# Altium PCB ngu-nghiep.pcbdoc
Units mm, origin at the board's own origin, x right, y up, seen from the top; angles counter-clockwise.
Board outline 76.4 x 59.23 mm, 2 copper layers (Top Layer, Bottom Layer); 80 components, 18 nets, 344 pads, 64 vias.
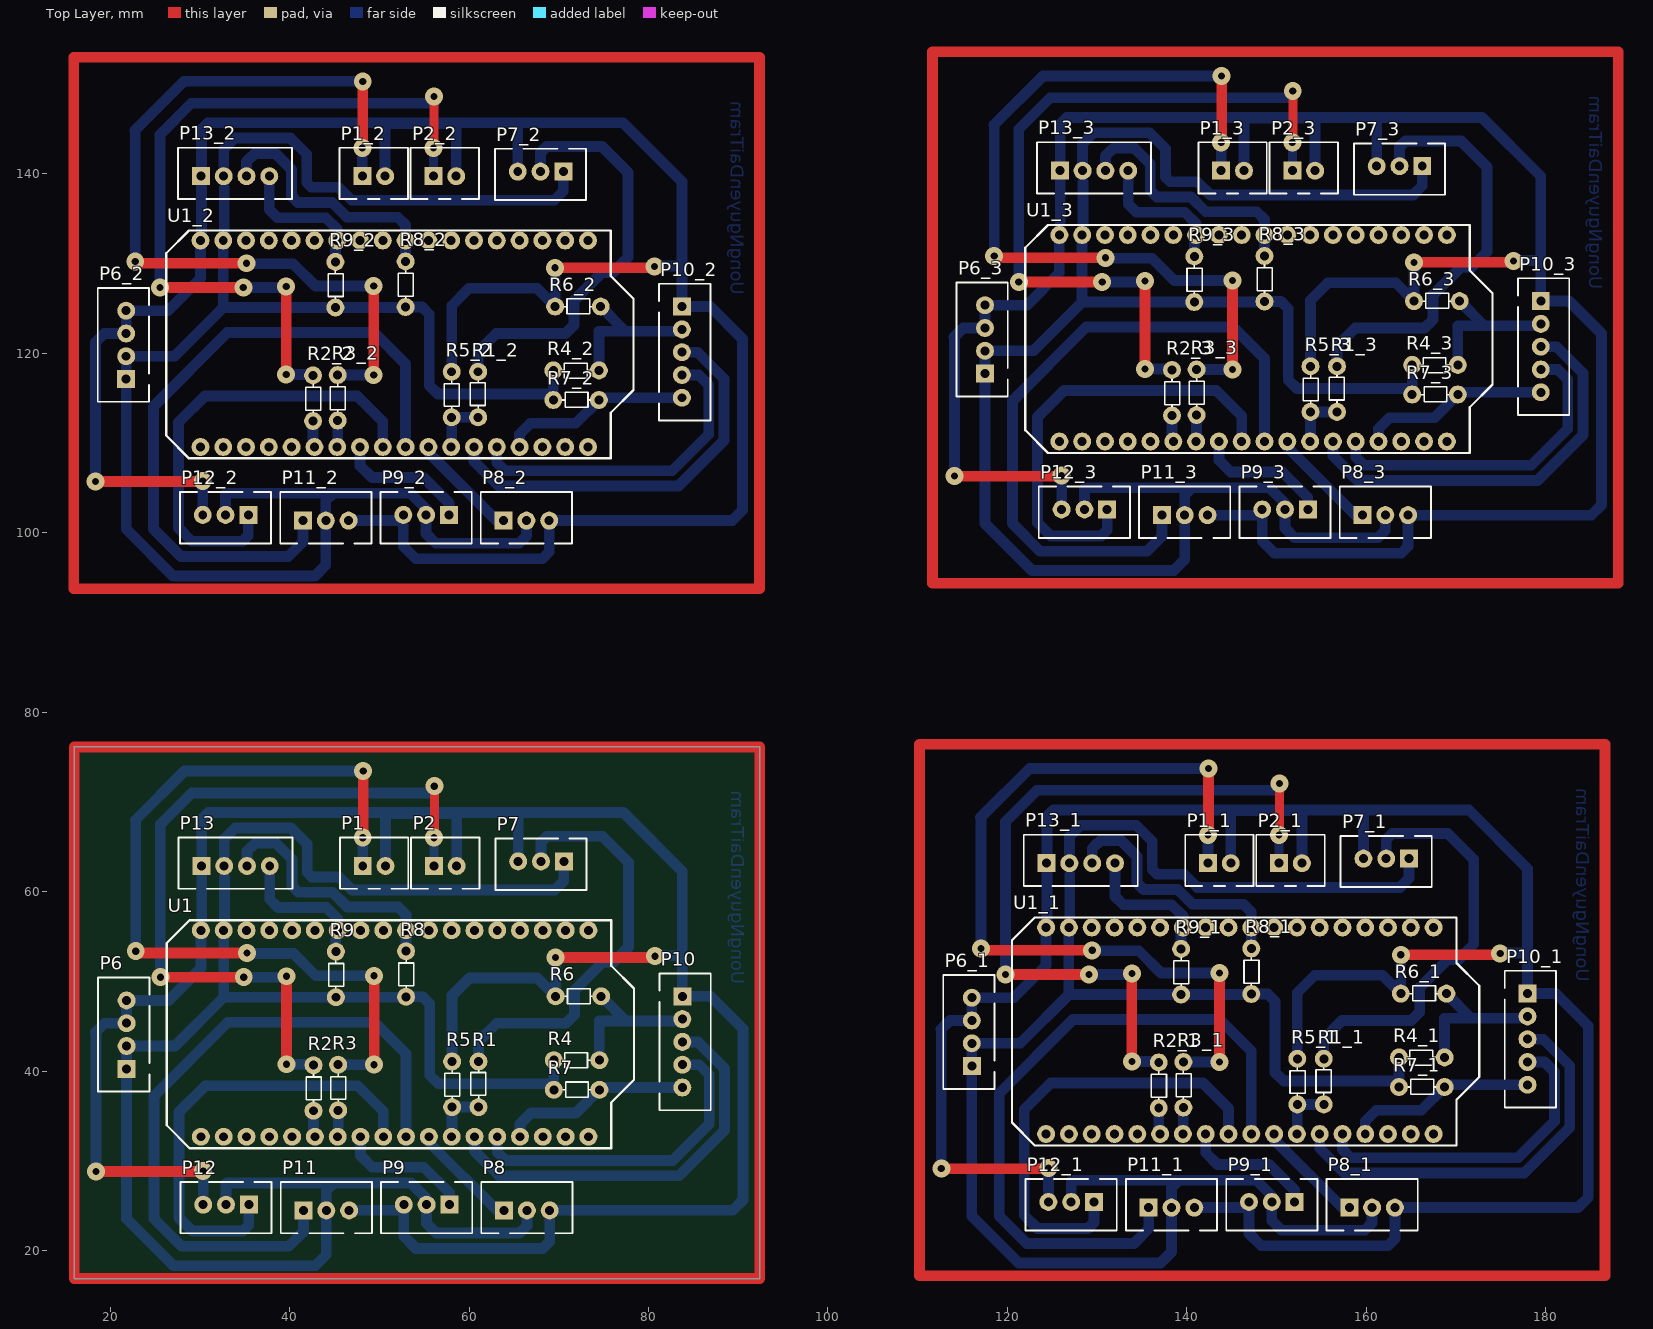
[diagram p0: Top Layer view]
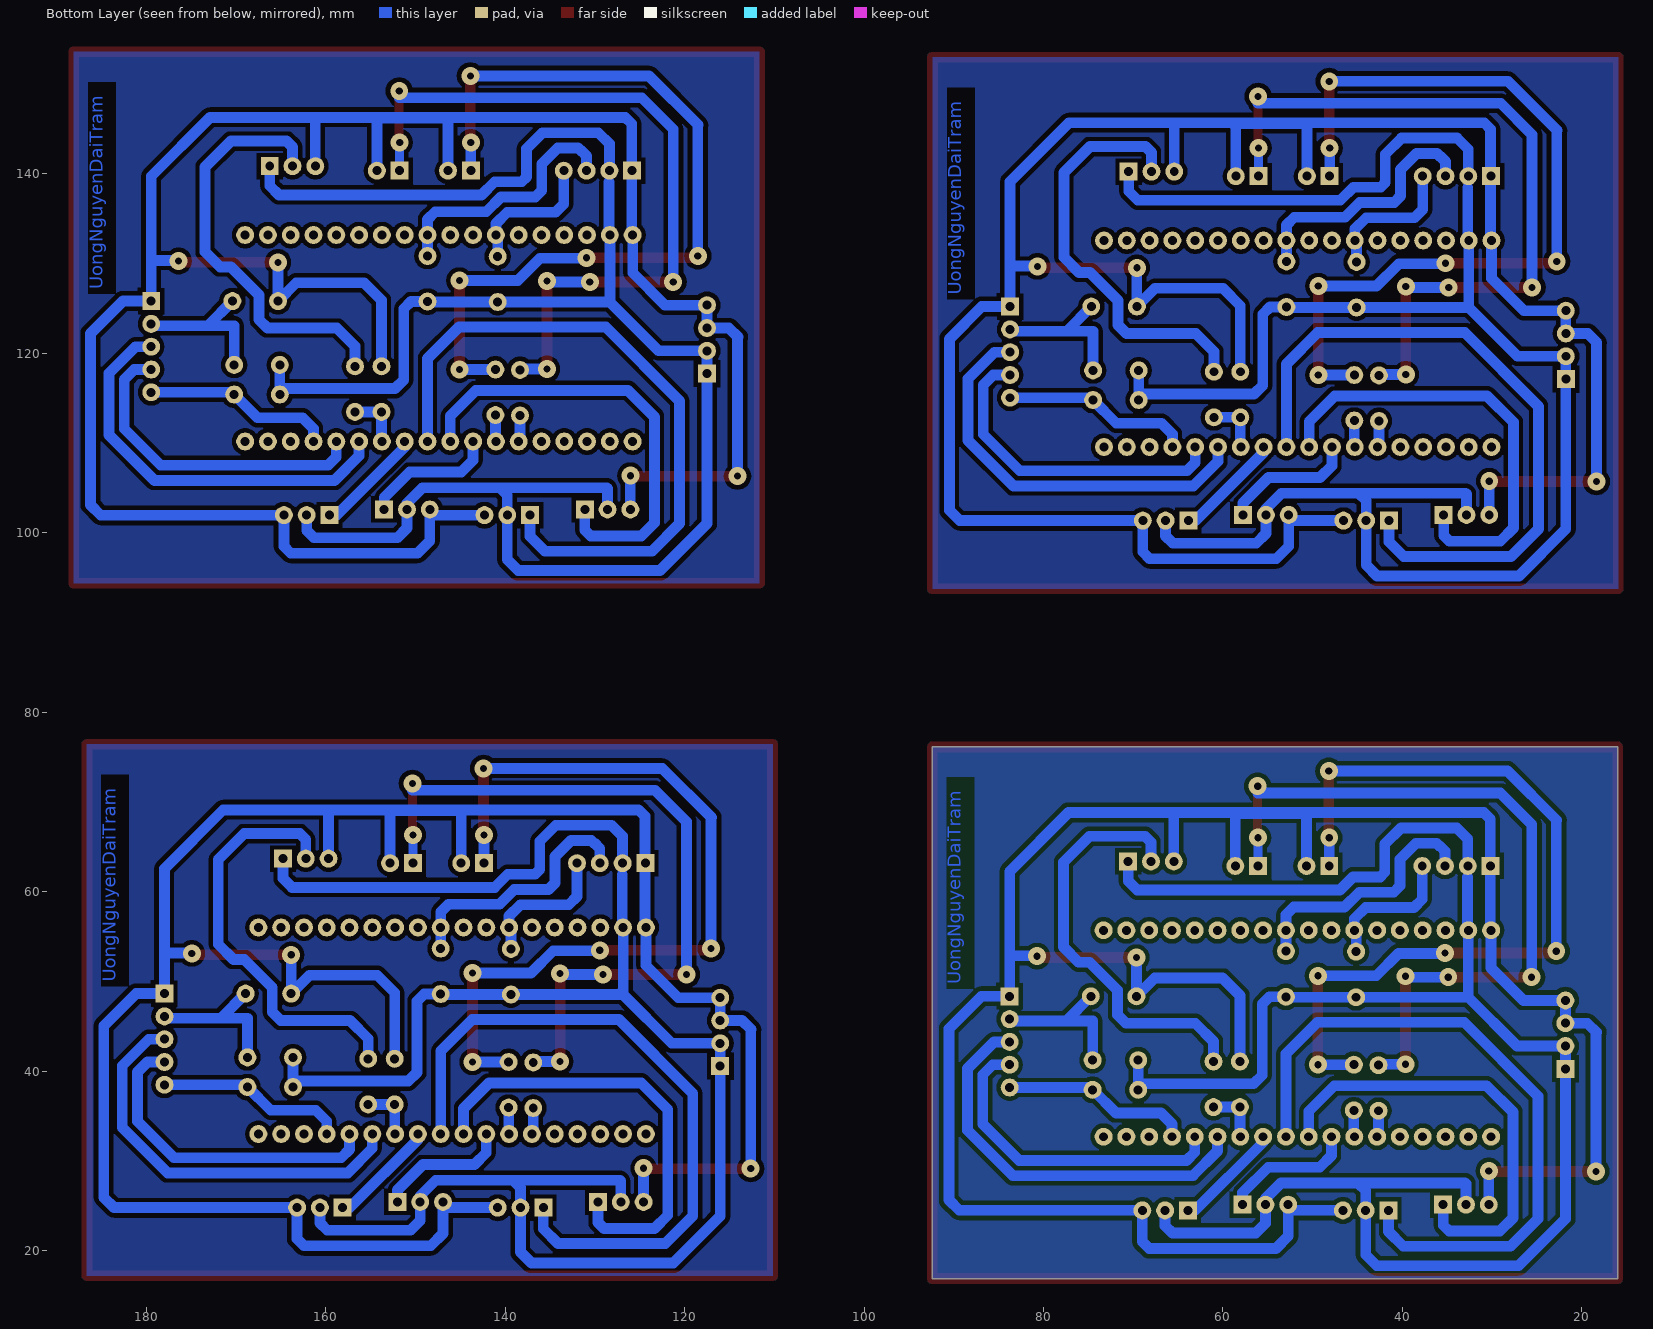
[diagram p1: Bottom Layer view, seen from below]

## Layer stack, top to bottom
Top Solder: solder mask 0.0102, Solder Resist, Dk 3.5
Top Layer: signal copper 0.0356
Dielectric 1: dielectric 0.32, FR-4, Dk 4.8
Bottom Layer: signal copper 0.0356
Bottom Solder: solder mask 0.0102, Solder Resist, Dk 3.5

## Board outline
16.002,16.916 16.002,76.149 92.405,76.149 92.405,16.916

## Design rules (kind name [scope] priority, off if disabled: settings)
Clearance [All] p1: gap=0.5 ignorepadtopadclearanceinfootprint=FALSE
PolygonConnect [All] p1: connectstyle=Relief reliefconductorwidth=0.254 reliefentries=4 polygonreliefangle="90 Angle" airgapwidth=0.254
RoutingVias [All] p1: holewidth=0.711 width=1.27 viastyle="Through Hole" minholewidth=0.711 minwidth=1.27 maxholewidth=0.711 maxwidth=1.27
SolderMaskExpansion [All] p1: expansion=0.102
Width [All] p1: maxlimit=1.2 minlimit=1 preferedwidth=1
30 further rules are at their usual default settings.

## Classes and differential pairs
component class Ngu-nghiep: P1 P2 P4 P6 P7 P8 P9 P10 P11 P12 P13 R1 R2 R3 R4 R5 R6 R7 R8 R9 U1

## Components (designator, comment, footprint, x,y, rotation, side; value= is the part's Value field where it differs from the comment)
P1 "Connector" JST-XH_B2B-XH-A 49.428,62.89 r0 top
P1_1 "Connector" JST-XH_B2B-XH-A 143.612,63.195 r0 top (schematic designator P1)
P1_2 "Connector" JST-XH_B2B-XH-A 49.378,139.751 r0 top (schematic designator P1)
P1_3 "Connector" JST-XH_B2B-XH-A 145.085,140.36 r0 top (schematic designator P1)
P2 "Connector" JST-XH_B2B-XH-A 57.353,62.89 r0 top
P2_1 "Connector" JST-XH_B2B-XH-A 151.536,63.195 r0 top (schematic designator P2)
P2_2 "Connector" JST-XH_B2B-XH-A 57.302,139.751 r0 top (schematic designator P2)
P2_3 "Connector" JST-XH_B2B-XH-A 153.01,140.36 r0 top (schematic designator P2)
P6 "Nguon" JST-XH_B4B-XH-A 21.844,44.094 r90 top
P6_1 "Nguon" JST-XH_B4B-XH-A 116.027,44.399 r90 top (schematic designator P6)
P6_2 "Nguon" JST-XH_B4B-XH-A 21.793,120.955 r90 top (schematic designator P6)
P6_3 "Nguon" JST-XH_B4B-XH-A 117.5,121.564 r90 top (schematic designator P6)
P7 "Connector" JST-XH_B3B-XH-A 68.021,63.398 r180 top
P7_1 "Connector" JST-XH_B3B-XH-A 162.204,63.703 r180 top (schematic designator P7)
P7_2 "Connector" JST-XH_B3B-XH-A 67.97,140.259 r180 top (schematic designator P7)
P7_3 "Connector" JST-XH_B3B-XH-A 163.678,140.868 r180 top (schematic designator P7)
P8 "Connector" JST-XH_B3B-XH-A 66.446,24.511 r0 top
P8_1 "Connector" JST-XH_B3B-XH-A 160.63,24.816 r0 top (schematic designator P8)
P8_2 "Connector" JST-XH_B3B-XH-A 66.396,101.371 r0 top (schematic designator P8)
P8_3 "Connector" JST-XH_B3B-XH-A 162.103,101.981 r0 top (schematic designator P8)
P9 "Connector" JST-XH_B3B-XH-A 55.27,25.146 r180 top
P9_1 "Connector" JST-XH_B3B-XH-A 149.454,25.451 r180 top (schematic designator P9)
P9_2 "Connector" JST-XH_B3B-XH-A 55.22,102.006 r180 top (schematic designator P9)
P9_3 "Connector" JST-XH_B3B-XH-A 150.927,102.616 r180 top (schematic designator P9)
P10 "Joystick" JST-XH_B5B-XH-A 83.769,43.282 r270 top
P10_1 "Joystick" JST-XH_B5B-XH-A 177.952,43.586 r270 top (schematic designator P10)
P10_2 "Joystick" JST-XH_B5B-XH-A 83.718,120.142 r270 top (schematic designator P10)
P10_3 "Joystick" JST-XH_B5B-XH-A 179.426,120.752 r270 top (schematic designator P10)
P11 "Connector" JST-XH_B3B-XH-A 44.094,24.511 r0 top
P11_1 "Connector" JST-XH_B3B-XH-A 138.278,24.816 r0 top (schematic designator P11)
P11_2 "Connector" JST-XH_B3B-XH-A 44.044,101.371 r0 top (schematic designator P11)
P11_3 "Connector" JST-XH_B3B-XH-A 139.751,101.981 r0 top (schematic designator P11)
P12 "Connector" JST-XH_B3B-XH-A 32.918,25.146 r180 top
P12_1 "Connector" JST-XH_B3B-XH-A 127.102,25.451 r180 top (schematic designator P12)
P12_2 "Connector" JST-XH_B3B-XH-A 32.868,102.006 r180 top (schematic designator P12)
P12_3 "Connector" JST-XH_B3B-XH-A 128.575,102.616 r180 top (schematic designator P12)
P13 "RTC" JST-XH_B4B-XH-A 33.985,62.89 r0 top
P13_1 "RTC" JST-XH_B4B-XH-A 128.168,63.195 r0 top (schematic designator P13)
P13_2 "RTC" JST-XH_B4B-XH-A 33.934,139.751 r0 top (schematic designator P13)
P13_3 "RTC" JST-XH_B4B-XH-A 129.642,140.36 r0 top (schematic designator P13)
R1 "5k6" R1/8W 61.062,38.557 r90 top value="R1/4W - 1K"
R1_1 "5k6" R1/8W 155.245,38.862 r90 top value="R1/4W - 1K" (schematic designator R1)
R1_2 "5k6" R1/8W 61.011,115.418 r90 top value="R1/4W - 1K" (schematic designator R1)
R1_3 "5k6" R1/8W 156.718,116.027 r90 top value="R1/4W - 1K" (schematic designator R1)
R2 "1k" R1/8W 42.672,38.151 r270 top value="R1/4W - 1K"
R2_1 "1k" R1/8W 136.855,38.456 r270 top value="R1/4W - 1K" (schematic designator R2)
R2_2 "1k" R1/8W 42.621,115.011 r270 top value="R1/4W - 1K" (schematic designator R2)
R2_3 "1k" R1/8W 138.328,115.621 r270 top value="R1/4W - 1K" (schematic designator R2)
R3 "1k" R1/8W 45.415,38.202 r270 top value="R1/4W - 1K"
R3_1 "1k" R1/8W 139.598,38.506 r270 top value="R1/4W - 1K" (schematic designator R3)
R3_2 "1k" R1/8W 45.364,115.062 r270 top value="R1/4W - 1K" (schematic designator R3)
R3_3 "1k" R1/8W 141.072,115.672 r270 top value="R1/4W - 1K" (schematic designator R3)
R4 "3k" R1/8W 71.984,41.25 r180 top value="R1/4W - 1K"
R4_1 "3k" R1/8W 166.167,41.554 r180 top value="R1/4W - 1K" (schematic designator R4)
R4_2 "3k" R1/8W 71.933,118.11 r180 top value="R1/4W - 1K" (schematic designator R4)
R4_3 "3k" R1/8W 167.64,118.72 r180 top value="R1/4W - 1K" (schematic designator R4)
R5 "10k" R1/8W 58.115,38.557 r270 top value="R1/4W - 1K"
R5_1 "10k" R1/8W 152.298,38.862 r270 top value="R1/4W - 1K" (schematic designator R5)
R5_2 "10k" R1/8W 58.064,115.418 r270 top value="R1/4W - 1K" (schematic designator R5)
R5_3 "10k" R1/8W 153.772,116.027 r270 top value="R1/4W - 1K" (schematic designator R5)
R6 "4k7" R1/8W 72.187,48.362 r0 top value="R1/4W - 1K"
R6_1 "4k7" R1/8W 166.37,48.666 r0 top value="R1/4W - 1K" (schematic designator R6)
R6_2 "4k7" R1/8W 72.136,125.222 r0 top value="R1/4W - 1K" (schematic designator R6)
R6_3 "4k7" R1/8W 167.843,125.832 r0 top value="R1/4W - 1K" (schematic designator R6)
R7 "10K" R1/8W 71.984,37.948 r0 top value="R1/4W - 1K"
R7_1 "10K" R1/8W 166.167,38.252 r0 top value="R1/4W - 1K" (schematic designator R7)
R7_2 "10K" R1/8W 71.933,114.808 r0 top value="R1/4W - 1K" (schematic designator R7)
R7_3 "10K" R1/8W 167.64,115.418 r0 top value="R1/4W - 1K" (schematic designator R7)
R8 "4k7" R1/8W 52.984,50.851 r270 top value="R1/4W - 1K"
R8_1 "4k7" R1/8W 147.168,51.156 r270 top value="R1/4W - 1K" (schematic designator R8)
R8_2 "4k7" R1/8W 52.934,127.711 r270 top value="R1/4W - 1K" (schematic designator R8)
R8_3 "4k7" R1/8W 148.641,128.321 r270 top value="R1/4W - 1K" (schematic designator R8)
R9 "4k7" R1/8W 45.161,50.8 r270 top value="R1/4W - 1K"
R9_1 "4k7" R1/8W 139.344,51.105 r270 top value="R1/4W - 1K" (schematic designator R9)
R9_2 "4k7" R1/8W 45.11,127.66 r270 top value="R1/4W - 1K" (schematic designator R9)
R9_3 "4k7" R1/8W 140.818,128.27 r270 top value="R1/4W - 1K" (schematic designator R9)
U1 "ESP32_heltec" ESP32_WFK_Heltec 51.714,44.145 r0 top
U1_1 "ESP32_heltec" ESP32_WFK_Heltec 145.898,44.45 r0 top (schematic designator U1)
U1_2 "ESP32_heltec" ESP32_WFK_Heltec 51.664,121.006 r0 top (schematic designator U1)
U1_3 "ESP32_heltec" ESP32_WFK_Heltec 147.371,121.615 r0 top (schematic designator U1)

## Footprints (in the part's own frame and the unit in brackets; to place one, negate y for a bottom-side part, rotate by r counter-clockwise, add the part's x,y. Pads: shape width x height; smd on the part's side, far side on the other; paste and mask are expansions set on the pad)
ESP32_WFK_Heltec [mm]
  round 2 hole 1: 1(-21.59,11.577) 2(-19.05,11.577) 3(-16.51,11.577) 4(-13.97,11.577) 5(-11.43,11.577) 6(-8.89,11.577) 7(-6.35,11.577) 8(-3.81,11.577) 9(-1.27,11.577) 10(1.27,11.577) 11(3.81,11.577) 12(6.35,11.577) 13(8.89,11.577) 14(11.43,11.577) 15(13.97,11.577) 16(16.51,11.577) 17(19.05,11.577) 18(21.59,11.577) 19(21.59,-11.43) 20(19.05,-11.43) 21(16.51,-11.43) 22(13.97,-11.43) 23(11.43,-11.43) 24(8.89,-11.43) 25(6.35,-11.43) 26(3.81,-11.43) 27(1.27,-11.43) 28(-1.27,-11.43) 29(-3.81,-11.43) 30(-6.35,-11.43) 31(-8.89,-11.43) 32(-11.43,-11.43) 33(-13.97,-11.43) 34(-16.51,-11.43) 35(-19.05,-11.43) 36(-21.59,-11.43)
  silkscreen extent -25.4,-12.7 26.67,12.7, body extent -24.6,-12.68 27.15,12.62, height 9.81
JST-XH_B2B-XH-A [mm] "JST; XH series; 2 circuit; 2.54 Pitch; Through-hole type; Top entry"
  rect 2x2 hole 1: 1(-1.27,0)
  round 2 hole 1: 2(1.27,0)
  silkscreen extent -3.81,-2.54 3.81,3.17, body extent -3.7,-2.56 3.7,3.19, height 7
JST-XH_B3B-XH-A [mm] "JST; XH series; 3 circuit; 2.54 Pitch; Through-hole type; Top entry"
  rect 2x2 hole 1: 1(-2.54,0)
  round 2 hole 1: 2(0,0) 3(2.54,0)
  silkscreen extent -5.08,-2.54 5.08,3.18, body extent -4.95,-2.55 4.95,3.2, height 7
JST-XH_B4B-XH-A [mm] "JST; XH series; 4 circuit; 2.54 Pitch; Through-hole type; Top entry"
  rect 2x2 hole 1: 1(-3.81,0)
  round 2 hole 1: 2(-1.27,0) 3(1.27,0) 4(3.81,0)
  silkscreen extent -6.35,-2.54 6.35,3.18, body extent -6.2,-2.57 6.2,3.18, height 7
JST-XH_B5B-XH-A [mm] "JST; XH series; 5 circuit; 2.54 Pitch; Through-hole type; Top entry"
  rect 2x2 hole 1: 1(-5.08,0)
  round 2 hole 1: 2(-2.54,0) 3(0,0) 4(2.54,0) 5(5.08,0)
  silkscreen extent -7.62,-2.54 7.62,3.18, body extent -7.45,-2.55 7.45,3.2, height 7
R1/8W [mm] "R 1/8W, 2 pin, 300mil"
  round 2 hole 1: 1(-2.54,0) 2(2.54,0)
  silkscreen extent -1.52,-0.81 1.55,0.86, body extent -3.43,-0.9 3.43,0.94, height 2.19

## Part data
P1 P1_1 P1_2 P1_3 P2 P2_1 P2_2 P2_3: library part Connector_2pin
P6 P6_1 P6_2 P6_3 P13 P13_1 P13_2 P13_3: library part Connector_4pin
P7 P7_1 P7_2 P7_3 P8 P8_1 P8_2 P8_3 P9 P9_1 P9_2 P9_3 P11 P11_1 P11_2 P11_3 P12 P12_1 P12_2 P12_3: library part Connector_3pin
P10 P10_1 P10_2 P10_3: library part Connector_5pin
R1 R1_1 R1_2 R1_3 R2 R2_1 R2_2 R2_3 R3 R3_1 R3_2 R3_3 R4 R4_1 R4_2 R4_3 R5 R5_1 R5_2 R5_3 R6 R6_1 R6_2 R6_3 R7 R7_1 R7_2 R7_3 R8 R8_1 R8_2 R8_3 R9 R9_1 R9_2 R9_3: library part R, "Resistor 1/4W"
U1 U1_1 U1_2 U1_3: "ESP32 IOT kit"

## Via types
v1: diameter 2, hole 0.8, Top Layer to Bottom Layer, 64 vias

## Nets (pads, with @x,y where several pads share a name; then routed paths per layer and width w, separated by ;. In a path a pad name is that pad's centre, name@x,y a point inside that pad or via, vN(x,y) a via of type N, cw(c..) or ccw(c..) an arc to the next point about the centre after c; other vN are vias at no path point)
3V3_Joystick: P10.2 R4.1 R6.2 | length 16.7
  Bottom Layer w1.2: R4.1@74.524,42.113 74.524,45.618 77.47,45.618 ; R6.2 77.47,45.618 ; P10.2 83.566,45.618 77.47,45.618
+5: P6.1 P6.2 P7.1 P8.2 P9.2 P11.2 P12.2 P13.2 R4.2 R7.1 R8.2 R9.2 U1.2 | length 218.8
  Bottom Layer w1.2: P13.2 32.715,65.888 33.958,67.13 40.159,67.13 41.961,65.329 41.961,62.179 42.472,61.668 45.503,61.668 46.972,60.198 69.545,60.198 70.561,61.214 P7.1 ; 32.766,61.62 32.766,55.824 U1.2 32.657,55.714 32.657,48.674 32.664,48.666 ; P12.2 32.918,27.469 33.02,27.571 44.945,27.571 ; P8.2 66.446,22.809 65.634,21.996 56.337,21.996 55.27,23.063 P9.2 55.27,25.828 53.528,27.571 44.945,27.571 ; R4.2 R7.1 68.783,38.608 56.591,38.608 55.626,39.573 55.626,47.498 54.813,48.311 R8.2 52.934,48.26 R9.2 33.071,48.26 32.664,48.666 ; 32.664,48.666 32.664,48.26 27.229,42.824 P6.2 P6.1 21.844,23.571 27.076,18.339 42.875,18.339 44.094,19.558 P11.2 44.094,26.721 44.945,27.571
Alarm: R2.2 U1.31 | length 3
  Bottom Layer w1.2: R2.2 42.672,32.868 U1.31
Error: R3.2 U1.30 | length 3
  Bottom Layer w1.2: U1.30 45.415,32.766 R3.2
GND: P1.2 P2.2 P6.3 P6.4 P7.3 P8.3 P9.3 P10.1 P11.3 P12.3 P13.1 R5.1 R6.1 U1.1 | length 278.1
  Top Layer w1.2: v1(18.44,28.854) 30.328,28.854 v1(30.378,28.905) ; v1(69.647,52.68) 80.569,52.68 v1(80.721,52.832)
  Bottom Layer w1.2: v1(18.44,28.854) 18.44,44.298 18.39,44.348 19.406,45.364 P6.3 P6.4 26.518,47.904 30.124,51.511 U1.1 30.226,55.824 30.226,68.123 30.937,68.834 77.216,68.834 83.769,62.281 83.769,52.883 ; P12.3 v1(30.378,28.905) ; P11.3 52.095,24.511 P9.3 52.73,21.641 54.102,20.269 68.224,20.269 68.986,21.031 P8.3 89.383,24.511 90.526,25.654 90.526,44.755 86.919,48.362 P10.1 83.769,52.883 ; P1.2 50.698,68.377 51.054,68.732 58.928,68.732 58.674,68.478 ; R5.1 58.115,48.463 60.046,50.394 67.615,50.394 R6.1 v1(69.647,52.68) ; P2.2 58.623,68.428 ; P7.3 65.481,68.326 ; v1(80.721,52.832) 80.772,52.883 83.769,52.883
NetP1_1: P1.1 R3.1 | length 94.6
  Top Layer w1.2: v1(22.86,53.391) 23.063,53.188 v1(35.255,53.188) ; v1(48.158,66.04) 48.209,66.091 v1(48.209,73.457) ; v1(49.428,40.742) v1(49.428,50.648)
  Bottom Layer w1.2: v1(22.86,53.391) 22.86,67.92 22.809,67.97 28.296,73.457 v1(48.209,73.457) ; v1@35.255,53.34 35.458,53.137 40.44,53.137 42.93,50.648 v1(49.428,50.648) ; R3.1 v1(49.428,40.742) ; P1.1 v1(48.158,66.04) v1@48.158,66.091
NetP2_1: P2.1 R2.1 | length 85.6
  Top Layer w1: v1(56.083,66.04) 56.134,66.091 v1(56.134,71.78)
  Top Layer w1.2: v1(25.603,50.495) v1(34.9,50.495) ; v1(39.675,40.792) v1(39.675,50.597)
  Bottom Layer w1: P2.1 v1(56.083,66.04)
  Bottom Layer w1.2: v1(25.603,50.495) 25.603,67.513 29.108,71.018 56.134,71.018 v1(56.134,71.78) ; v1(34.9,50.495) 39.573,50.495 v1(39.675,50.597) ; v1(39.675,40.792) 42.57,40.792 R2.1
pH_pin: P8.1 U1.26 | length 12.1
  Bottom Layer w1.2: U1.26 55.524,32.106 63.119,24.511 P8.1
SCL: P13.4 R9.1 U1.7 | length 15.9
  Bottom Layer w1.2: P13.4 37.795,59.182 38.71,58.268 44.094,58.268 45.364,56.998 U1.7 45.161,55.519 R9.1
SDA: P13.3 R8.1 U1.10 | length 28.9
  Bottom Layer w1.2: P13.3 35.255,64.534 35.8,65.078 35.858,65.078 36.21,65.43 38.478,65.43 40.261,63.647 40.261,60.679 40.972,59.968 44.799,59.968 46.448,58.318 52.121,58.318 52.984,57.455 U1.10 R8.1
SERVO_1: P12.1 U1.28 | length 50.7
  Bottom Layer w1.2: P12.1 35.458,22.86 34.798,22.2 29.159,22.2 27.686,23.673 27.686,35.458 30.632,38.405 47.6,38.405 50.444,35.56 U1.28
SERVO_2: P11.1 U1.27 | length 76.8
  Bottom Layer w1.2: P11.1 41.554,22.149 39.905,20.5 27.964,20.5 24.892,23.571 24.892,37.236 33.122,45.466 49.479,45.466 52.984,41.961 U1.27
SS2: R1.1 R5.2 U1.25 | length 6.3
  Bottom Layer w1.2: U1.25 58.115,32.766 R5.2 R1.1
SW: P10.5 R7.2 U1.22 | length 21.2
  Bottom Layer w1.2: U1.22 65.684,34.138 66.904,35.357 71.933,35.357 R7.2 74.778,38.202 P10.5
Tem_pin: P9.1 U1.29 | length 15
  Bottom Layer w1.2: U1.29 47.904,30.632 49.225,29.312 54.966,29.312 57.81,26.467 P9.1
Tur_pin: P7.2 R1.2 | length 47.7
  Bottom Layer w1.2: R1.2 61.062,43.332 63.094,45.364 70.815,45.364 71.747,46.296 71.747,49.039 74.868,52.16 76.087,52.16 77.775,53.848 77.775,63.297 74.879,66.192 68.682,66.192 68.021,65.532 P7.2
VRx: P10.3 U1.24 | length 45.5
  Bottom Layer w1.2: U1.24 60.604,31.124 63.355,28.374 83.407,28.374 88.466,33.433 88.466,40.328 85.513,43.282 P10.3
VRy: P10.4 U1.23 | length 36.4
  Bottom Layer w1.2: U1.23 63.144,30.988 64.059,30.074 82.702,30.074 86.766,34.138 86.766,39.624 85.649,40.742 P10.4
pads on no net: P1_1.1 P1_1.2 P1_2.1 P1_2.2 P1_3.1 P1_3.2 P2_1.1 P2_1.2 P2_2.1 P2_2.2 P2_3.1 P2_3.2 P6_1.1 P6_1.2 P6_1.3 P6_1.4 P6_2.1 P6_2.2 P6_2.3 P6_2.4 P6_3.1 P6_3.2 P6_3.3 P6_3.4 P7_1.1 P7_1.2 P7_1.3 P7_2.1 P7_2.2 P7_2.3 P7_3.1 P7_3.2 P7_3.3 P8_1.1 P8_1.2 P8_1.3 P8_2.1 P8_2.2 P8_2.3 P8_3.1 P8_3.2 P8_3.3 P9_1.1 P9_1.2 P9_1.3 P9_2.1 P9_2.2 P9_2.3 P9_3.1 P9_3.2 P9_3.3 P10_1.1 P10_1.2 P10_1.3 P10_1.4 P10_1.5 P10_2.1 P10_2.2 P10_2.3 P10_2.4 P10_2.5 P10_3.1 P10_3.2 P10_3.3 P10_3.4 P10_3.5 P11_1.1 P11_1.2 P11_1.3 P11_2.1 P11_2.2 P11_2.3 P11_3.1 P11_3.2 P11_3.3 P12_1.1 P12_1.2 P12_1.3 P12_2.1 P12_2.2 P12_2.3 P12_3.1 P12_3.2 P12_3.3 P13_1.1 P13_1.2 P13_1.3 P13_1.4 P13_2.1 P13_2.2 P13_2.3 P13_2.4 P13_3.1 P13_3.2 P13_3.3 P13_3.4 R1_1.1 R1_1.2 R1_2.1 R1_2.2 R1_3.1 R1_3.2 R2_1.1 R2_1.2 R2_2.1 R2_2.2 R2_3.1 R2_3.2 R3_1.1 R3_1.2 R3_2.1 R3_2.2 R3_3.1 R3_3.2 R4_1.1 R4_1.2 R4_2.1 R4_2.2 R4_3.1 R4_3.2 R5_1.1 R5_1.2 R5_2.1 R5_2.2 R5_3.1 R5_3.2 R6_1.1 R6_1.2 R6_2.1 R6_2.2 R6_3.1 R6_3.2 R7_1.1 R7_1.2 R7_2.1 R7_2.2 R7_3.1 R7_3.2 R8_1.1 R8_1.2 R8_2.1 R8_2.2 R8_3.1 R8_3.2 R9_1.1 R9_1.2 R9_2.1 R9_2.2 R9_3.1 R9_3.2 U1.3 U1.4 U1.5 U1.6 U1.8 U1.9 U1.11 U1.12 U1.13 U1.14 U1.15 U1.16 U1.17 U1.18 U1.19 U1.20 U1.21 U1.32 U1.33 U1.34 U1.35 U1.36 U1_1.1 U1_1.2 U1_1.3 U1_1.4 U1_1.5 U1_1.6 U1_1.7 U1_1.8 U1_1.9 U1_1.10 U1_1.11 U1_1.12 U1_1.13 U1_1.14 U1_1.15 U1_1.16 U1_1.17 U1_1.18 U1_1.19 U1_1.20 U1_1.21 U1_1.22 U1_1.23 U1_1.24 U1_1.25 U1_1.26 U1_1.27 U1_1.28 U1_1.29 U1_1.30 U1_1.31 U1_1.32 U1_1.33 U1_1.34 U1_1.35 U1_1.36 U1_2.1 U1_2.2 U1_2.3 U1_2.4 U1_2.5 U1_2.6 U1_2.7 U1_2.8 U1_2.9 U1_2.10 U1_2.11 U1_2.12 U1_2.13 U1_2.14 U1_2.15 U1_2.16 U1_2.17 U1_2.18 U1_2.19 U1_2.20 U1_2.21 U1_2.22 U1_2.23 U1_2.24 U1_2.25 U1_2.26 U1_2.27 U1_2.28 U1_2.29 U1_2.30 U1_2.31 U1_2.32 U1_2.33 U1_2.34 U1_2.35 U1_2.36 U1_3.1 U1_3.2 U1_3.3 U1_3.4 U1_3.5 U1_3.6 U1_3.7 U1_3.8 U1_3.9 U1_3.10 U1_3.11 U1_3.12 U1_3.13 U1_3.14 U1_3.15 U1_3.16 U1_3.17 U1_3.18 U1_3.19 U1_3.20 U1_3.21 U1_3.22 U1_3.23 U1_3.24 U1_3.25 U1_3.26 U1_3.27 U1_3.28 U1_3.29 U1_3.30 U1_3.31 U1_3.32 U1_3.33 U1_3.34 U1_3.35 U1_3.36
copper on no net: | length 4254.1
  Top Layer w1: v1(56.032,142.9) 56.083,142.951 v1(56.083,148.641) ; v1(150.266,66.345) 150.317,66.396 v1(150.317,72.085) ; v1(151.74,143.51) 151.79,143.561 v1(151.79,149.25)
  Top Layer w1.2: v1(18.39,105.715) 30.277,105.715 v1(30.328,105.766) ; v1(22.809,130.251) 23.012,130.048 v1(35.204,130.048) ; v1(25.552,127.356) v1(34.849,127.356) ; v1(39.624,117.653) v1(39.624,127.457) ; v1(48.108,142.9) 48.158,142.951 v1(48.158,150.317) ; v1(49.378,117.602) v1(49.378,127.508) ; v1(69.596,129.54) 80.518,129.54 v1(80.67,129.692) ; v1(112.624,29.159) 124.511,29.159 v1(124.562,29.21) ; v1(114.097,106.324) 125.984,106.324 v1(126.035,106.375) ; v1(117.043,53.696) 117.246,53.492 v1(129.438,53.492) ; v1(118.516,130.861) 118.72,130.658 v1(130.912,130.658) ; v1(119.786,50.8) v1(129.083,50.8) ; v1(121.26,127.965) v1(130.556,127.965) ; v1(133.858,41.097) v1(133.858,50.902) ; v1(135.331,118.262) v1(135.331,128.067) ; v1(142.342,66.345) 142.392,66.396 v1(142.392,73.762) ; v1(143.612,41.046) v1(143.612,50.952) ; v1(143.815,143.51) 143.866,143.561 v1(143.866,150.927) ; v1(145.085,118.212) v1(145.085,128.118) ; v1(163.83,52.984) 174.752,52.984 v1(174.904,53.137) ; v1(165.303,130.15) 176.225,130.15 v1(176.378,130.302) ; 15.951,93.777 15.951,153.01 92.354,153.01 92.354,93.777 15.951,93.777 ; 16.002,16.916 92.405,16.916 92.405,76.149 16.002,76.149 16.002,16.916 ; 110.185,17.221 110.185,76.454 186.588,76.454 186.588,17.221 110.185,17.221 ; 111.658,94.386 111.658,153.619 188.062,153.619 188.062,94.386 111.658,94.386
  Bottom Layer w1: 56.032,139.751 v1(56.032,142.9) ; 150.266,63.195 v1(150.266,66.345) ; 151.74,140.36 v1(151.74,143.51)
  Bottom Layer w1.2: v1(18.39,105.715) 18.39,121.158 18.339,121.209 19.355,122.225 21.793,122.225 21.793,124.765 26.467,124.765 30.074,128.372 30.074,132.583 30.175,132.684 30.175,144.983 30.886,145.694 77.165,145.694 83.718,139.141 83.718,129.743 ; v1(22.809,130.251) 22.809,144.78 22.758,144.831 28.245,150.317 v1(48.158,150.317) ; v1(25.552,127.356) 25.552,144.374 29.058,147.879 56.083,147.879 v1(56.083,148.641) ; 30.328,102.006 v1(30.328,105.766) ; 32.664,139.751 32.664,142.748 33.907,143.991 40.108,143.991 41.91,142.189 41.91,139.04 42.422,138.528 45.452,138.528 46.922,137.058 69.494,137.058 70.51,138.074 70.51,140.259 ; 32.715,138.481 32.715,132.684 32.614,132.583 32.606,132.575 32.606,125.535 32.614,125.527 ; 32.868,102.006 32.868,104.33 32.969,104.431 44.894,104.431 ; v1(34.849,127.356) 39.522,127.356 v1(39.624,127.457) ; v1@35.204,130.2 35.408,129.997 40.39,129.997 42.879,127.508 v1(49.378,127.508) ; 35.204,139.751 35.204,141.394 35.749,141.939 35.807,141.939 36.159,142.291 38.427,142.291 40.21,140.508 40.21,137.539 40.921,136.828 44.748,136.828 46.397,135.179 52.07,135.179 52.934,134.315 52.934,132.583 52.934,130.251 ; 35.408,102.006 35.408,99.72 34.747,99.06 29.108,99.06 27.635,100.533 27.635,112.319 30.582,115.265 47.549,115.265 50.394,112.42 50.394,109.576 ; 37.744,139.751 37.744,136.042 38.659,135.128 44.044,135.128 45.314,133.858 45.314,132.583 45.11,132.379 45.11,130.2 ; v1(39.624,117.653) 42.52,117.653 42.621,117.551 ; 41.504,101.371 41.504,99.009 39.854,97.36 27.913,97.36 24.841,100.432 24.841,114.097 33.071,122.326 49.428,122.326 52.934,118.821 52.934,109.576 ; 42.621,112.471 42.621,109.728 42.774,109.576 ; 45.314,109.576 45.364,109.626 45.364,112.522 ; 45.364,117.602 v1(49.378,117.602) ; 46.584,101.371 52.045,101.371 52.68,102.006 52.68,98.501 54.051,97.13 68.174,97.13 68.936,97.892 68.936,101.371 89.332,101.371 90.475,102.514 90.475,121.615 86.868,125.222 83.718,125.222 83.718,129.743 ; 47.854,109.576 47.854,107.493 49.174,106.172 54.915,106.172 57.76,103.327 57.76,102.006 ; 48.108,139.751 v1(48.108,142.9) v1@48.108,142.951 ; 50.648,139.751 50.648,145.237 51.003,145.593 58.877,145.593 58.623,145.339 ; 55.474,109.576 55.474,108.966 63.068,101.371 63.856,101.371 ; 58.014,109.576 58.064,109.626 58.064,112.878 61.011,112.878 ; 58.064,117.958 58.064,125.324 59.995,127.254 67.564,127.254 69.596,125.222 v1(69.596,129.54) ; 58.572,139.751 58.572,145.288 ; 60.554,109.576 60.554,107.984 63.304,105.234 83.356,105.234 88.416,110.294 88.416,117.189 85.462,120.142 83.718,120.142 ; 61.011,117.958 61.011,120.193 63.043,122.225 70.764,122.225 71.696,123.156 71.696,125.9 74.817,129.021 76.036,129.021 77.724,130.708 77.724,140.157 74.828,143.053 68.631,143.053 67.97,142.392 67.97,140.259 ; 63.094,109.576 63.094,107.848 64.008,106.934 82.652,106.934 86.716,110.998 86.716,116.484 85.598,117.602 83.718,117.602 ; 65.43,140.259 65.43,145.186 ; 65.634,109.576 65.634,110.998 66.853,112.217 71.882,112.217 74.473,114.808 74.727,115.062 83.718,115.062 ; 66.396,101.371 66.396,99.67 65.583,98.857 56.286,98.857 55.22,99.924 55.22,102.006 55.22,102.689 53.477,104.431 44.894,104.431 ; 69.393,118.11 69.393,114.808 68.732,115.468 56.54,115.468 55.575,116.434 55.575,124.358 54.762,125.171 52.934,125.171 52.883,125.12 45.11,125.12 33.02,125.12 32.614,125.527 ; 74.473,118.974 74.473,122.479 77.419,122.479 ; 74.676,125.222 77.419,122.479 ; v1(80.67,129.692) 80.721,129.743 83.718,129.743 ; 83.718,122.682 83.515,122.479 77.419,122.479 ; v1(112.624,29.159) 112.624,44.602 112.573,44.653 113.589,45.669 116.027,45.669 116.027,48.209 120.701,48.209 124.308,51.816 124.308,56.027 124.409,56.129 124.409,68.428 125.12,69.139 171.399,69.139 177.952,62.586 177.952,53.188 ; v1(114.097,106.324) 114.097,121.768 114.046,121.818 115.062,122.834 117.5,122.834 117.5,125.374 122.174,125.374 125.781,128.981 125.781,133.192 125.882,133.294 125.882,145.593 126.594,146.304 172.872,146.304 179.426,139.751 179.426,130.353 ; v1(117.043,53.696) 117.043,68.224 116.992,68.275 122.479,73.762 v1(142.392,73.762) ; v1(118.516,130.861) 118.516,145.39 118.466,145.44 123.952,150.927 v1(143.866,150.927) ; v1(119.786,50.8) 119.786,67.818 123.292,71.323 150.317,71.323 v1(150.317,72.085) ; v1(121.26,127.965) 121.26,144.983 124.765,148.488 151.79,148.488 v1(151.79,149.25) ; 124.562,25.451 v1(124.562,29.21) ; 126.035,102.616 v1(126.035,106.375) ; 126.898,63.195 126.898,66.192 128.141,67.435 134.342,67.435 136.144,65.634 136.144,62.484 136.656,61.972 139.686,61.972 141.156,60.503 163.728,60.503 164.744,61.519 164.744,63.703 ; 126.949,61.925 126.949,56.129 126.848,56.027 126.84,56.019 126.84,48.979 126.848,48.971 ; 127.102,25.451 127.102,27.774 127.203,27.876 139.128,27.876 ; 128.372,140.36 128.372,143.358 129.614,144.6 135.816,144.6 137.617,142.799 137.617,139.649 138.129,139.138 141.159,139.138 142.629,137.668 165.202,137.668 166.218,138.684 166.218,140.868 ; 128.422,139.09 128.422,133.294 128.321,133.192 128.313,133.184 128.313,126.144 128.321,126.136 ; 128.575,102.616 128.575,104.939 128.676,105.041 140.601,105.041 ; v1(129.083,50.8) 133.756,50.8 v1(133.858,50.902) ; v1@129.438,53.645 129.642,53.442 134.624,53.442 137.113,50.952 v1(143.612,50.952) ; 129.438,63.195 129.438,64.838 129.983,65.383 130.041,65.383 130.393,65.735 132.661,65.735 134.444,63.952 134.444,60.984 135.155,60.272 138.982,60.272 140.631,58.623 146.304,58.623 147.168,57.76 147.168,56.027 147.168,53.696 ; 129.642,25.451 129.642,23.165 128.981,22.504 123.342,22.504 121.869,23.978 121.869,35.763 124.816,38.71 141.783,38.71 144.628,35.865 144.628,33.02 ; v1(130.556,127.965) 135.23,127.965 v1(135.331,128.067) ; v1@130.912,130.81 131.115,130.607 136.097,130.607 138.586,128.118 v1(145.085,128.118) ; 130.912,140.36 130.912,142.004 131.456,142.548 131.514,142.548 131.866,142.9 134.134,142.9 135.917,141.117 135.917,138.149 136.628,137.438 140.455,137.438 142.104,135.788 147.777,135.788 148.641,134.925 148.641,133.192 148.641,130.861 ; 131.115,102.616 131.115,100.33 130.454,99.67 124.816,99.67 123.342,101.143 123.342,112.928 126.289,115.875 143.256,115.875 146.101,113.03 146.101,110.185 ; 131.978,63.195 131.978,59.487 132.893,58.572 138.278,58.572 139.548,57.302 139.548,56.027 139.344,55.824 139.344,53.645 ; 133.452,140.36 133.452,136.652 134.366,135.738 139.751,135.738 141.021,134.468 141.021,133.192 140.818,132.989 140.818,130.81 ; v1(133.858,41.097) 136.754,41.097 136.855,40.996 ; v1(135.331,118.262) 138.227,118.262 138.328,118.161 ; 135.738,24.816 135.738,22.454 134.088,20.804 122.147,20.804 119.075,23.876 119.075,37.541 127.305,45.771 143.662,45.771 147.168,42.266 147.168,33.02 ; 136.855,35.916 136.855,33.172 137.008,33.02 ; 137.211,101.981 137.211,99.619 135.562,97.97 123.62,97.97 120.548,101.041 120.548,114.706 128.778,122.936 145.136,122.936 148.641,119.431 148.641,110.185 ; 138.328,113.081 138.328,110.338 138.481,110.185 ; 139.548,33.02 139.598,33.071 139.598,35.966 ; 139.598,41.046 v1(143.612,41.046) ; 140.818,24.816 146.279,24.816 146.914,25.451 146.914,21.946 148.285,20.574 162.408,20.574 163.17,21.336 163.17,24.816 183.566,24.816 184.709,25.959 184.709,45.06 181.102,48.666 177.952,48.666 177.952,53.188 ; 141.021,110.185 141.072,110.236 141.072,113.132 ; 141.072,118.212 v1(145.085,118.212) ; 142.088,33.02 142.088,30.937 143.408,29.616 149.149,29.616 151.994,26.772 151.994,25.451 ; 142.291,101.981 147.752,101.981 148.387,102.616 148.387,99.111 149.758,97.739 163.881,97.739 164.643,98.501 164.643,101.981 185.039,101.981 186.182,103.124 186.182,122.225 182.575,125.832 179.426,125.832 179.426,130.353 ; 142.342,63.195 v1(142.342,66.345) v1@142.342,66.396 ; 143.561,110.185 143.561,108.102 144.882,106.782 150.622,106.782 153.467,103.937 153.467,102.616 ; 143.815,140.36 v1(143.815,143.51) v1@143.815,143.561 ; 144.882,63.195 144.882,68.682 145.237,69.037 153.111,69.037 152.857,68.783 ; 146.355,140.36 146.355,145.847 146.71,146.202 154.584,146.202 154.33,145.948 ; 149.708,33.02 149.708,32.41 157.302,24.816 158.09,24.816 ; 151.181,110.185 151.181,109.576 158.775,101.981 159.563,101.981 ; 152.248,33.02 152.298,33.071 152.298,36.322 155.245,36.322 ; 152.298,41.402 152.298,48.768 154.229,50.698 161.798,50.698 163.83,48.666 v1(163.83,52.984) ; 152.806,63.195 152.806,68.732 ; 153.721,110.185 153.772,110.236 153.772,113.487 156.718,113.487 ; 153.772,118.567 153.772,125.933 155.702,127.864 163.271,127.864 165.303,125.832 v1(165.303,130.15) ; 154.28,140.36 154.28,145.898 ; 154.788,33.02 154.788,31.429 157.538,28.678 177.59,28.678 182.65,33.738 182.65,40.633 179.696,43.586 177.952,43.586 ; 155.245,41.402 155.245,43.637 157.277,45.669 164.998,45.669 165.93,46.601 165.93,49.344 169.051,52.465 170.27,52.465 171.958,54.153 171.958,63.602 169.062,66.497 162.865,66.497 162.204,65.837 162.204,63.703 ; 156.261,110.185 156.261,108.594 159.011,105.844 179.063,105.844 184.123,110.903 184.123,117.798 181.169,120.752 179.426,120.752 ; 156.718,118.567 156.718,120.802 158.75,122.834 166.472,122.834 167.403,123.766 167.403,126.509 170.524,129.63 171.743,129.63 173.431,131.318 173.431,140.767 170.536,143.662 164.338,143.662 163.678,143.002 163.678,140.868 ; 157.328,33.02 157.328,31.293 158.242,30.378 176.886,30.378 180.95,34.442 180.95,39.929 179.832,41.046 177.952,41.046 ; 158.801,110.185 158.801,108.458 159.715,107.544 178.359,107.544 182.423,111.608 182.423,117.094 181.305,118.212 179.426,118.212 ; 159.664,63.703 159.664,68.631 ; 159.868,33.02 159.868,34.442 161.087,35.662 166.116,35.662 168.707,38.252 168.961,38.506 177.952,38.506 ; 160.63,24.816 160.63,23.114 159.817,22.301 150.52,22.301 149.454,23.368 149.454,25.451 149.454,26.133 147.711,27.876 139.128,27.876 ; 161.138,140.868 161.138,145.796 ; 161.341,110.185 161.341,111.608 162.56,112.827 167.589,112.827 170.18,115.418 170.434,115.672 179.426,115.672 ; 162.103,101.981 162.103,100.279 161.29,99.466 151.994,99.466 150.927,100.533 150.927,102.616 150.927,103.298 149.184,105.041 140.601,105.041 ; 163.627,41.554 163.627,38.252 162.966,38.913 150.774,38.913 149.809,39.878 149.809,47.803 148.996,48.616 147.168,48.616 147.117,48.565 139.344,48.565 127.254,48.565 126.848,48.971 ; 165.1,118.72 165.1,115.418 164.44,116.078 152.248,116.078 151.282,117.043 151.282,124.968 150.47,125.781 148.641,125.781 148.59,125.73 140.818,125.73 128.727,125.73 128.321,126.136 ; 168.707,42.418 168.707,45.923 171.653,45.923 ; 168.91,48.666 171.653,45.923 ; 170.18,119.583 170.18,123.088 173.126,123.088 ; 170.383,125.832 173.126,123.088 ; v1(174.904,53.137) 174.955,53.188 177.952,53.188 ; v1(176.378,130.302) 176.428,130.353 179.426,130.353 ; 177.952,46.126 177.749,45.923 171.653,45.923 ; 179.426,123.292 179.222,123.088 173.126,123.088 ; 32.614,125.527 32.614,125.12 27.178,119.685 21.793,119.685 21.793,117.145 21.793,100.432 27.026,95.199 42.824,95.199 44.044,96.418 44.044,101.371 44.044,103.581 44.894,104.431 ; 126.848,48.971 126.848,48.565 121.412,43.129 116.027,43.129 116.027,40.589 116.027,23.876 121.26,18.644 137.058,18.644 138.278,19.863 138.278,24.816 138.278,27.026 139.128,27.876 ; 128.321,126.136 128.321,125.73 122.885,120.294 117.5,120.294 117.5,117.754 117.5,101.041 122.733,95.809 138.532,95.809 139.751,97.028 139.751,101.981 139.751,104.191 140.601,105.041

## Polygon pours and split planes (outlines as drawn)
no net on Bottom Layer (solid, pour order 30): 111.658,94.386 111.658,153.619 188.062,153.619 188.062,94.386
no net on Bottom Layer (solid, pour order 28): 15.951,93.777 15.951,153.01 92.354,153.01 92.354,93.777
no net on Bottom Layer (solid, pour order 26): 110.185,17.221 110.185,76.454 186.588,76.454 186.588,17.221
no net on Bottom Layer (solid, pour order 24): 16.002,16.916 16.002,76.149 92.405,76.149 92.405,16.916

## Other copper
Bottom Layer:
  text "UongNguyenDaiTram" at 184.353,127.152 h2.5 r270
  text "UongNguyenDaiTram" at 88.646,126.543 h2.5 r270
  text "UongNguyenDaiTram" at 182.88,49.987 h2.5 r270
  text "UongNguyenDaiTram" at 88.697,49.682 h2.5 r270